# Altium PCB FIT_PM_Dual_Range_AFE.PcbDoc (part 9 of 17)
Units mm, origin at the board's own origin, x right, y up, seen from the top; angles counter-clockwise.
Board outline 259 x 114 mm, 8 copper layers (Top Layer, Mid-Layer 1, Mid-Layer 2, Layer 1, Layer 2, Mid-Layer 3, Mid-Layer 4, Bottom Layer), stack 1.616 mm thick; 963 components, 806 nets, 4757 pads, 2208 vias.
Unrouted connection lines stored in the file: 682.
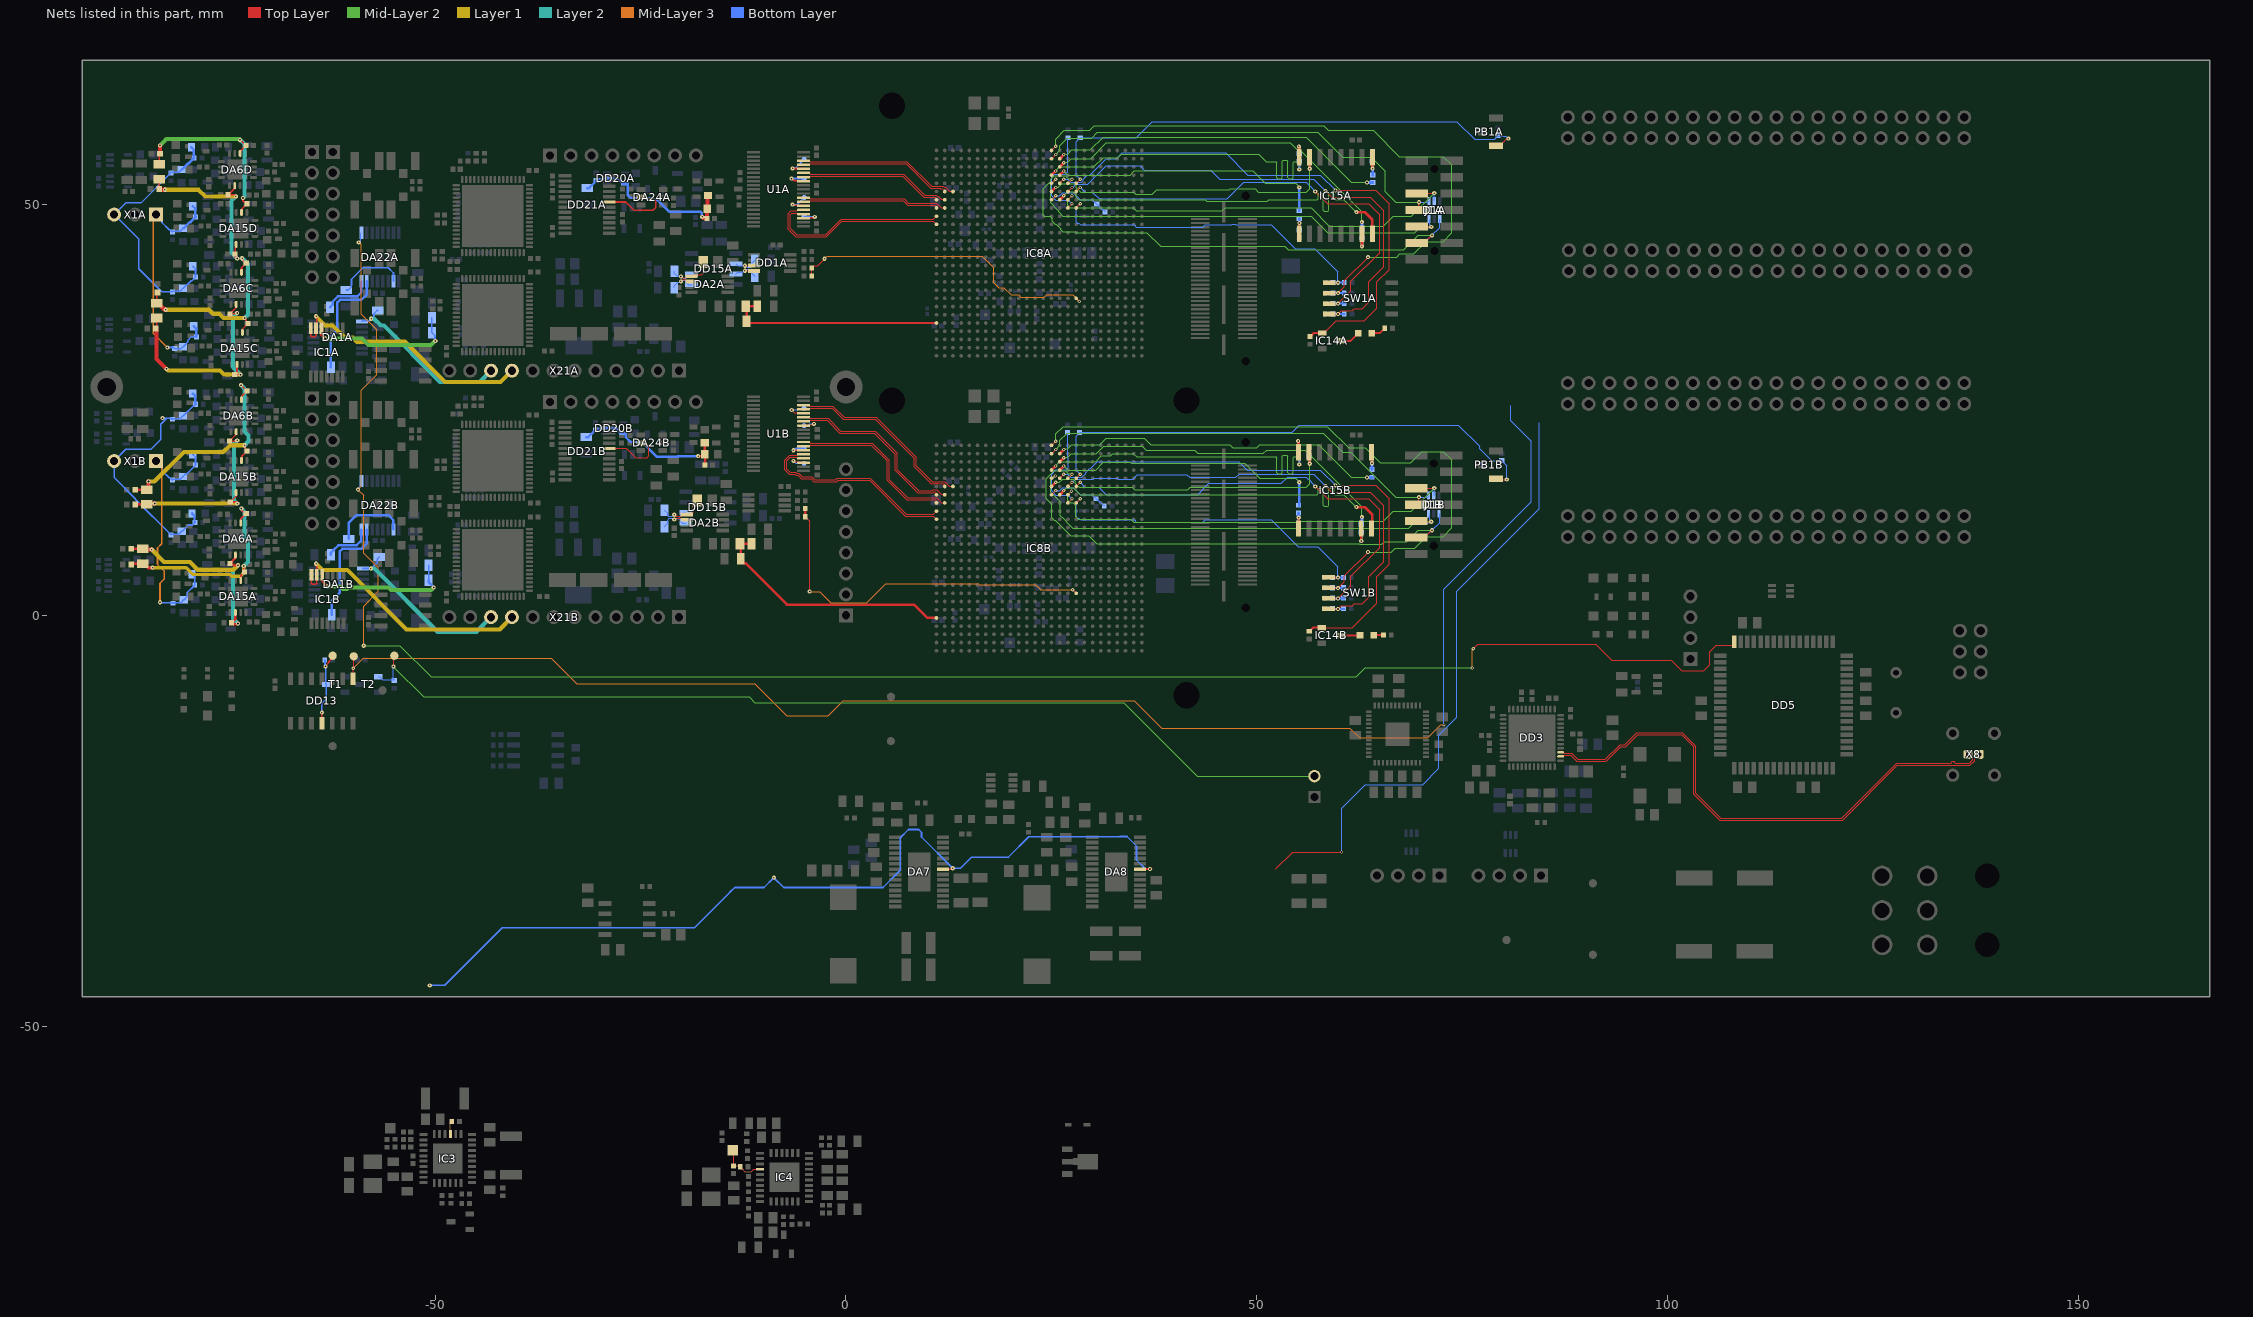
[diagram p11: the nets of this part, all layers, seen from the top]

## Via types
v1: diameter 0.5, hole 0.2, Top Layer to Bottom Layer, tented both sides, 1234 vias
v2: diameter 0.4, hole 0.2, Top Layer to Bottom Layer, tented both sides, 876 vias
v3: diameter 1, hole 0.6, Top Layer to Bottom Layer, tented both sides, 74 vias
v4: diameter 0.8, hole 0.4, Top Layer to Bottom Layer, tented both sides, 15 vias
v5: diameter 0.5, hole 0.2, Top Layer to Bottom Layer, 9 vias

## Nets (pads, with @x,y where several pads share a name; then routed paths per layer and width w, separated by ;. In a path a pad name is that pad's centre, name@x,y a point inside that pad or via, vN(x,y) a via of type N, cw(c..) or ccw(c..) an arc to the next point about the centre after c; other vN are vias at no path point) (continued)
DA15A_P: C64A.2 C74A.2 C304A.2 DA6A.2 DA15A.2 R300A.1 | length 27.3
  Top Layer w0.2: DA15A.2@-73.675,4.25 -73.675,4.825 C64A.2@-73.2,5.3 -73.3,5.4 v1(-73.3,6) ; DA6A.2@-73.675,11.25 -73.652,11.273 -73.652,11.748 C74A.2@-73,12.4 -73.21,12.61 -73.378,12.61 -73.543,12.775 -73.543,12.943 v1(-73.6,13)
  Top Layer w0.3: R300A.1@-87,6.2 -86.9,6.3 C304A.2@-85.6,6.3
  Top Layer w0.4: C304A.2@-85.6,6.3 -85.425,6.3 -84.925,5.8 v1(-84.4,5.8)
  Layer 1 w0.4: v1(-84.4,5.8) -80.33,5.8 -79.505,4.975 -74.984,4.975 -74.785,4.776 -73.698,4.776 -73.3,5.174 v1(-73.3,6)
  Layer 2 w0.5: v1(-73.6,13) -73.2,12.6 -73.2,9.6 -72.8,9.2 -72.8,6.5 v1(-73.3,6)
DA15B_P: C64B.2 C74B.2 C304B.2 DA6B.2 DA15B.2 R300B.1 | length 28.5
  Top Layer w0.2: v1(-73.641,28.022) -73.622,28.022 C74B.2@-72.9,27.3 -73.546,26.654 -73.546,26.279 DA6B.2@-73.575,26.25 ; DA15B.2@-73.575,18.85 -73.552,18.873 -73.552,19.348 C64B.2@-72.9,20 -73.11,20.21 -73.11,20.529 -73.2,20.619 v1(-73.2,20.7)
  Top Layer w0.3: R300B.1@-86.5,15.3 C304B.2@-85.1,15.3
  Top Layer w0.5: C304B.2@-85.1,15.3 -84.9,15.5 v1(-84.9,16.3)
  Layer 1 w0.5: v1(-84.9,16.3) -84.2,16.3 -80.6,19.9 -75.8,19.9 -75,20.7 v1(-73.2,20.7)
  Layer 2 w0.5: v1(-73.641,28.022) -73.2,27.581 -73.2,22.4 -72.706,21.906 -72.706,21.194 v1(-73.2,20.7)
DA15C_P: C64C.2 C74C.2 C304C.2 DA6C.2 DA15C.2 R300C.1 | length 24.9
  Top Layer w0.2: C304C.2@-83.9,38 -83.9,39.2 R300C.1@-83.8,39.3 ; DA6C.2@-73.575,41.75 -73.575,42.325 C64C.2@-73,42.9 -73.21,43.11 -73.31,43.11 -73.443,43.243 -73.443,43.409 v1(-73.501,43.466) ; DA15C.2@-73.475,34.45 -73.446,34.479 -73.446,34.854 C74C.2@-72.8,35.5 -73.01,35.71 -73.01,35.933 -73.2,36.123 v1(-73.2,36.2)
  Top Layer w0.5: C304C.2@-83.9,38 -83.725,38 -82.925,37.2 v1(-82.8,37.2)
  Layer 1 w0.5: v1(-82.8,37.2) -77.512,37.2 -77.016,36.704 -76.251,36.704 -75.748,36.2 v1(-73.2,36.2)
  Layer 2 w0.5: v1(-73.501,43.466) -72.81,42.775 -72.81,36.59 v1(-73.2,36.2)
DA15D_P: C64D.2 C74D.2 C304D.2 DA6D.2 DA15D.2 R300D.1 | length 24.5
  Top Layer w0.2: C304D.2@-83.6,54.9 -83.6,56.1 R300D.1@-83.5,56.2 ; v1(-73.756,57.881) -73.717,57.881 -73.6,57.763 -73.6,57.75 C74D.2@-73.05,57.2 -73.743,56.507 DA6D.2@-73.743,56.218 ; DA15D.2@-73.575,49.05 -73.546,49.079 -73.546,49.454 C64D.2@-72.9,50.1 -73.11,50.31 -73.278,50.31 -73.395,50.427 -73.395,50.795 v1(-73.4,50.8)
  Top Layer w0.5: R300D.1@-83.5,56.2 v1(-83.5,57.2)
  Mid-Layer 2 w0.5: v1(-83.5,57.2) -82.732,57.968 -73.844,57.968 v1(-73.756,57.881)
  Layer 2 w0.5: v1(-73.756,57.881) -73.744,57.893 -73.2,57.349 -73.2,51 v1(-73.4,50.8)
DA18A_P: C63A.2 C102A.2 C304A.1 DA6A.10 DA15A.10 R400A.1 | length 26.7
  Top Layer w0.3: R400A.1@-87,8.1 C304A.1@-85.6,8.1 ; DA15A.10@-74.325,0.35 -74.325,-0.425 C63A.2@-74.8,-0.9 -74.64,-1.06 -74.504,-1.06 -74.464,-1.1 -74.1,-1.1 v1(-74,-1) ; DA6A.10@-74.325,7.35 -74.335,7.34 -74.335,6.965 C102A.2@-75,6.3 -74.84,6.14 -74.54,6.14 -74.5,6.1 v1(-74,6.1)
  Top Layer w0.5: C304A.1@-85.6,8.1 -85.5,8 v1(-84.5,8)
  Layer 1 w0.5: v1(-84.5,8) -83,6.5 -79.865,6.5 -78.915,5.55 -74.55,5.55 v1(-74,6.1)
  Layer 2 w0.5: v1(-74,-1) -74.6,-0.4 -74.6,5.5 v1(-74,6.1)
DA18B_P: C63B.2 C102B.2 C304B.1 DA6B.10 DA15B.10 R400B.1 | length 25.4
  Top Layer w0.2: DA15B.10@-74.225,14.95 -74.254,14.921 -74.254,14.496 C102B.2@-74.95,13.8 -74.2,13.8 -74.2,13.781 -74.1,13.681 v1(-74.1,13.6) ; DA6B.10@-74.225,22.35 -74.225,22.059 -74.3,21.984 -74.3,21.95 C63B.2@-75.05,21.2 -74.4,21.2 -74.3,21.3 v1(-74.1,21.3)
  Top Layer w0.3: R400B.1@-86.5,13.5 C304B.1@-85.1,13.5
  Top Layer w0.5: C304B.1@-85.1,13.5 -84.993,13.607 v1(-84.15,13.607)
  Layer 1 w0.5: v1(-84.15,13.607) -84.141,13.597 -76.352,13.597 -76.349,13.6 v1(-74.1,13.6)
  Layer 2 w0.5: v1(-74.1,13.6) -74.5,14 -74.5,20.9 v1(-74.1,21.3)
DA18C_P: C63C.2 C102C.2 C304C.1 DA6C.10 DA15C.10 R400C.1 | length 28.6
  Top Layer w0.2: R400C.1@-84,34.9 -83.9,35 C304C.1@-83.9,36.2 ; DA6C.10@-74.225,37.85 -74.254,37.821 -74.254,37.446 C102C.2@-75,36.7 -74.294,36.7 -74.194,36.8 v1(-74.113,36.8) ; DA15C.10@-74.125,30.55 -74.125,29.575 C63C.2@-74.4,29.3 v1(-73.7,29.3)
  Top Layer w0.5: R400C.1@-84,34.9 -83.9,34.8 -83.9,31.2 v1(-82.7,30)
  Layer 1 w0.5: v1(-82.7,30) -82.5,29.8 -76.2,29.8 -75.7,29.3 v1(-73.7,29.3)
  Layer 2 w0.5: v1(-74.113,36.8) -74.6,36.313 -74.6,30.2 v1(-73.7,29.3)
DA18D_P: C63D.2 C102D.2 C304D.1 DA6D.10 DA15D.10 R400D.1 | length 23.4
  Top Layer w0.2: R400D.1@-83.6,51.9 C304D.1@-83.6,53.1 ; DA6D.10@-74.393,52.318 -74.393,52.027 -74.468,51.952 -74.468,51.932 C102D.2@-75.2,51.2 -74.417,51.2 -74.268,51.051 v1(-74.268,51) ; DA15D.10@-74.225,45.15 -74.225,44.859 -74.35,44.734 C63D.2@-74.35,44 -74.307,43.957 -74.307,43.557 -74.298,43.557 -74.181,43.44 v1(-74.1,43.44)
  Top Layer w0.5: R400D.1@-83.6,51.9 -83.5,51.8 v1(-82.9,51.8)
  Layer 1 w0.5: v1(-82.9,51.8) -78.8,51.8 -77.982,50.982 -74.286,50.982 v1(-74.268,51)
  Layer 2 w0.5: v1(-74.268,51) -74.8,50.468 -74.8,44.14 v1(-74.1,43.44)
DAC_SYNCA: DA22A.9 DA22B.9 DD5.16 | length 230.4
  Top Layer w0.15: v2(76.352,-4.073) 76.92,-3.504 91.273,-3.504 93.235,-5.466 100.428,-5.466 101.71,-6.748 104.403,-6.748 105.119,-6.032 105.119,-4.447 105.956,-3.61 107.919,-3.61 108.119,-3.41 DD5.16@108.119,-3.214
  Mid-Layer 2 w0.1: v1(-58.7,-3.7) -54.3,-3.7 -50.5,-7.5 62.133,-7.5 63.228,-6.406 76.211,-6.406 v2(76.219,-6.414)
  Mid-Layer 3 w0.1: v1(-59.3,45.4) -59,45.1 -59,36.669 -57.1,34.769 -57.1,29.3 -59,27.4 -59,15.7 v1(-59.4,15.3) -58.7,14.6 -58.7,7.546 -56.921,5.767 -56.921,2.906 -58.7,1.127 v1(-58.7,-3.7)
  Mid-Layer 3 w0.15: v2(76.219,-6.414) 76.229,-6.404 76.229,-4.277 76.352,-4.154 v2(76.352,-4.073)
  Bottom Layer w0.1: v1(-59.4,15.3) -59.4,15.4 -58.975,15.825 DA22B.9@-58.975,16.35 ; v1(-59.3,45.4) -59.053,45.647 -59.053,46.472 DA22A.9@-58.975,46.55
DAC_VOUTBA: DA22A.2 R45xA.1 | length 8.7
  Bottom Layer w0.2: R45xA.1@-60.8,39.6 -60.575,39.6 -60.2,39.975 -60.2,40.2 -60.195,40.205 -60.195,40.905 -58.8,42.3 -55.7,42.3 -55.075,41.675 DA22A.2@-55.075,40.65
DAC_VOUTBB: DA22B.2 R45xB.1 | length 9.2
  Bottom Layer w0.3: R45xB.1@-60.5,9.3 -60.5,11.3 -59.6,12.2 -55.7,12.2 -55.1,11.6 -55.1,10.475 DA22B.2@-55.075,10.45
DAC_VOUTCA: DA22A.7 R34A.1 | length 13.8
  Bottom Layer w0.3: R34A.1@-62.7,30.2 -62.7,34 -61.9,34.8 -61.9,38.1 -61.6,38.4 -59,38.4 -58.325,39.075 DA22A.7@-58.325,40.65
DAC_VOUTCB: DA22B.7 R34B.1 | length 13.5
  Bottom Layer w0.3: R34B.1@-62.6,0.1 -62.6,1.783 -61.6,2.783 -61.6,7.8 -61.306,8.094 -59.006,8.094 -58.325,8.775 DA22B.7@-58.325,10.45
DAC_VOUTDA: DA22A.8 R121xA.1 | length 6.1
  Bottom Layer w0.3: R121xA.1@-62.8,37.5 -62.475,37.825 -62.475,38.201 -61.841,38.835 -59.465,38.835 -58.975,39.325 DA22A.8@-58.975,40.65
DAC_VOUTDB: DA22B.8 R121xB.1 | length 5.9
  Bottom Layer w0.3: R121xB.1@-62.7,7.4 -62.7,7.625 -62.375,7.95 -62.364,7.95 -61.78,8.534 -59.566,8.534 -58.975,9.125 DA22B.8@-58.975,10.45
DD20_VCCA: C94A.2 C96A.2 DD20A.2 DD20A.5 R49A.2 R50A.2 R123A.2 | length 21
  Top Layer w0.5: v1(-17.5,48.5) -17.36,48.36 -16.96,48.36 C96A.2@-16.9,48.3 R50A.2@-16.9,49.5 -16.85,49.55 -16.85,51.05 R49A.2@-16.8,51.1
  Bottom Layer w0.3: R123A.2@-31.5,52 -31.275,52 -30.56,52.715 -30.56,52.79 C94A.2@-30.4,52.95 -30.24,53.11 -29.465,53.11 -29.375,53.2 DD20A.2@-29.1,53.2 -29.05,53.15 -27.775,53.15 -27.175,52.55 DD20A.5@-26.9,52.55 -26.625,52.55 -26.575,52.5 -26.575,51.175 -26.2,50.8 -23.698,50.8 -23.498,50.6 -23,50.6 -21.5,49.1 -17.676,49.1 -17.538,48.963 -17.538,48.538 v1(-17.5,48.5)
DD20_VCCB: C94B.2 C96B.2 DD20B.2 DD20B.5 R49B.2 R50B.2 R123B.2 | length 19.4
  Top Layer w0.3: v1(-17.993,19.38) -17.42,19.38 R50B.2@-17.2,19.6 ; R49B.2@-17.2,21 R50B.2@-17.2,19.6 ; C96B.2@-17.15,18.3 -17.15,19.55 R50B.2@-17.2,19.6
  Bottom Layer w0.3: R123B.2@-31.6,21.7 -31.375,21.7 -30.685,22.39 -30.66,22.39 C94B.2@-30.5,22.55 -30.34,22.71 -29.665,22.71 -29.575,22.8 DD20B.2@-29.3,22.8 -29.25,22.75 -27.975,22.75 -27.375,22.15 DD20B.5@-27.1,22.15 -26.85,22.15 -26.8,22.1 -26.8,21.676 -26.224,21.1 -24.8,21.1 -22.981,19.281 -20.564,19.281 -20.465,19.38 v1(-17.993,19.38)
DD21_DLYCTRLA: DA24A.5 DD21A.7 | length 8.9
  Top Layer w0.2: DD21A.7@-28.8,50.317 -26.818,50.317 -25.8,49.3 -23.5,49.3 -23.16,49.64 -23.16,50.36 -23.5,50.7 -24.75,50.7 DA24A.5@-24.95,50.9
DD21_DLYCTRLB: DA24B.5 DD21B.7 | length 7.7
  Top Layer w0.145: DD21B.7@-28.8,20.318 -26.718,20.318 -25.6,19.2 -24.2,19.2 -24,19.4 -24,20.5 -24.273,20.773 -24.773,20.773 DA24B.5@-25,21
DE1A: TP7A.1 U1A.34 | length 3.2
  Top Layer w0.2: v1(-6.5,54.4) -6.496,54.396 -5.2,54.396 U1A.34@-5.15,54.346
  Bottom Layer w0.2: v1(-6.5,54.4) -6.443,54.457 -6.135,54.457 TP7A.1@-5.086,55.506
DE1B: TP7B.1 U1B.34 | length 3.2
  Top Layer w0.15: v1(-6.6,25) -6.275,24.675 -5.225,24.675 U1B.34@-5.15,24.6
  Bottom Layer w0.15: v1(-6.6,25) -5.93,25 -5.73,25.2 TP7B.1@-5.1,25.2
DE2A: TP9A.1 U1A.31 | length 3.2
  Top Layer w0.2: v1(-6.627,53.152) -6.546,53.152 -6.29,52.896 -5.2,52.896 U1A.31@-5.15,52.846
  Bottom Layer w0.2: v1(-6.627,53.152) -6.61,53.169 -5.103,53.169 TP9A.1@-5.086,53.186
DE2B: TP9B.1 U1B.31 | length 2.6
  Top Layer w0.15: U1B.31@-5.15,23.1 -5.075,23.175 -4.12,23.175 -3.995,23.3 v1(-3.9,23.3)
  Bottom Layer w0.15: TP9B.1@-5.1,23.091 -4.624,23.091 -4.415,23.3 v1(-3.9,23.3)
DE3A: TP10A.1 U1A.25 | length 3.2
  Top Layer w0.2: v1(-6.5,49.991) -6.419,49.991 -6.324,49.896 -5.2,49.896 U1A.25@-5.15,49.846
  Bottom Layer w0.2: v1(-6.5,49.991) -5.961,49.991 TP10A.1@-5.086,50.866
DE3B: TP10B.1 U1B.25 | length 2.6
  Top Layer w0.2: v1(-6.4,20.1) U1B.25@-5.15,20.1
  Bottom Layer w0.2: v1(-6.4,20.1) -6.319,20.1 -6.119,20.3 TP10B.1@-5.1,20.3
DE4A: TP11A.1 U1A.22 | length 2.7
  Top Layer w0.2: U1A.22@-5.15,48.346 -5.1,48.396 -3.904,48.396 v1(-3.8,48.5)
  Bottom Layer w0.2: TP11A.1@-5.086,48.546 -5.063,48.523 -3.823,48.523 v1(-3.8,48.5)
DE4B: TP11B.1 U1B.22 | length 2.8
  Top Layer w0.15: v1(-6.4,18.8) -6.275,18.675 -5.225,18.675 U1B.22@-5.15,18.6
  Bottom Layer w0.15: v1(-6.4,18.8) -6.1,18.5 TP11B.1@-5.1,18.5
DONE1_LED_RA: LED1A.2 R144A.1 | length 1.8
  Top Layer w0.254: LED1A.2@64.004,34.346 64.991,34.346 65.41,34.765 65.41,34.785 R144A.1@65.573,34.948
DONE1_LED_RB: LED1B.2 R144B.1 | length 1.2
  Top Layer w0.254: LED1B.2@64.218,-2.402 R144B.1@65.423,-2.402
DONE1_LEDA: IC14A.3 LED1A.1 | length 2.5
  Top Layer w0.254: IC14A.3@60.268,33.412 61.421,33.412 LED1A.1@62.354,34.346
DONE1_LEDB: IC14B.3 LED1B.1 | length 2.4
  Top Layer w0.254: IC14B.3@60.193,-2.452 62.518,-2.452 LED1B.1@62.568,-2.402
DRV_OA_N: R237A.1 R237B.1 R238A.1 R238B.1 R239A.1 R239B.1 R240A.1 R240B.1 X1B.1 | length 33.4
  Mid-Layer 3 w0.2: X1B.1@-84,18.78 -83.3,18.08 -83.3,8.7 -83.8,8.2 -83.8,6.2 -83,5.4 -83,4.4 -83.5,3.9 v1(-83.5,1.6)
  Bottom Layer w0.2: X1B.1@-84,18.78 -83.25,18.03 -83.25,17.614 -82.386,16.75 -82.3,16.75 -82.02,16.47 R240B.1@-82,16.47 -81.92,16.55 -81.05,16.55 R239B.1@-80.7,16.9 -80.35,17.25 -80.2,17.25 -79.17,18.28 R238B.1@-79.17,18.3 -79.17,19.27 R237B.1@-79.5,19.6 ; v1(-83.5,1.6) -83.443,1.543 -81.973,1.543 R240A.1@-81.9,1.47 -81.82,1.55 -80.95,1.55 R239A.1@-80.6,1.9 -80.55,1.9 -80.2,2.25 -80.2,2.75 -79.27,3.68 -79.27,4.67 R237A.1@-79.6,5
DRV_OA_P: R233A.1 R233B.1 R234A.1 R234B.1 R235A.1 R235B.1 R236A.1 R236B.1 X1B.3 | length 32.9
  Bottom Layer w0.2: v1(-83.2,24) -82.665,24 ; R235A.1@-82.34,9.985 R235A.1@-82.15,9.795 ; R233A.1@-79.24,11.3 -79.24,11.28 -79.43,11.09 -79.45,11.09 -79.54,11 -80.025,11 -80.8,10.225 R236A.1@-80.85,10.225 -81.2,9.875 -82.07,9.875 R235A.1@-82.15,9.795 ; R233B.1@-79.17,25.7 -79.17,25.68 -79.36,25.49 -79.46,25.49 -80.65,24.3 R236B.1@-80.7,24.3 -81.05,23.95 -81.92,23.95 R235B.1@-82,23.87 -82.13,24 -82.665,24 ; -82.665,24 -83.4,23.265 -83.4,21.4 -84.6,20.2 -87.66,20.2 X1B.3@-89.08,18.78 -89.08,16.78 -86.5,14.2 -86.5,14.125 -82.17,9.795 R235A.1@-82.15,9.795
  Bottom Layer w0.3: R234A.1@-79.6,12.4 -79.3,12.1 -79.3,11.36 R233A.1@-79.24,11.3 ; R234B.1@-79.5,27 -79.2,26.7 -79.2,25.73 R233B.1@-79.17,25.7
DRV_OC_N: R237C.1 R237D.1 R238C.1 R238D.1 R239C.1 R239D.1 R240C.1 R240D.1 X1A.1 | length 30.7
  Mid-Layer 3 w0.2: X1A.1@-84,48.78 -84.3,48.48 -84.3,34.3 v1(-82.6,32.6)
  Bottom Layer w0.2: X1A.1@-84,48.78 -83.25,48.03 -83.25,47.814 -82.386,46.95 -82.3,46.95 -82.02,46.67 R240D.1@-82,46.67 -81.92,46.75 -81.05,46.75 R239D.1@-80.7,47.1 ; v1(-82.6,32.6) -81.83,32.6 R240C.1@-81.7,32.47 -80.93,32.47 R239C.1@-80.7,32.7 -80.65,32.7 -80.3,33.05 -80.3,33.1 -80.1,33.3 -80.1,33.5 -79.67,33.93 R238C.1@-79.1,33.93
  Bottom Layer w0.3: R239D.1@-80.7,47.1 -80.65,47.1 -79.88,47.87 -79.78,47.87 -79.17,48.48 R238D.1@-79.17,48.5 -79.2,48.53 -79.2,49.5 R237D.1@-79.5,49.8 ; R237C.1@-79.4,35.2 -79.1,34.9 R238C.1@-79.1,33.93
DRV_OC_P: R233C.1 R233D.1 R234C.1 R234D.1 R235C.1 R235D.1 R236C.1 R236D.1 X1A.3 | length 32.4
  Bottom Layer w0.2: R235D.1@-82.343,54.013 R235D.1@-82.168,53.838 ; R236D.1@-80.868,54.268 -81.218,53.918 -82.088,53.918 R235D.1@-82.168,53.838 ; R236C.1@-80.7,39.8 -81.05,39.45 -81.92,39.45 R235C.1@-82,39.37 -83.27,39.37 -86.1,42.2 -86.1,45.8 X1A.3@-89.08,48.78 -87.66,50.2 -85.82,50.2 -82.182,53.838 R235D.1@-82.168,53.838 ; R236C.1@-80.65,39.8 -79.707,40.743 -79.607,40.743 -79.17,41.18 R233C.1@-79.17,41.2 -79.17,42.17 R234C.1@-79.5,42.5
  Bottom Layer w0.3: R236D.1@-80.868,54.268 -80.818,54.268 -80.048,55.038 -79.948,55.038 -79.338,55.648 R233D.1@-79.338,55.668 -79.368,55.698 -79.368,56.668 R234D.1@-79.668,56.968
DRV_OFFSETA: DA1A.1 R41A.2 X21A.10 | length 21
  Layer 2 w0.5: v1(-57.8,36.1) -57.449,36.1 -56.623,35.274 -56.226,35.274 -52.813,31.861 -52.813,31.813 -49.4,28.4 -44.58,28.4 X21A.10@-43.2,29.78
  Bottom Layer w0.2: DA1A.1@-58.919,35.774 -58.829,35.865 -58.035,35.865 -57.458,36.442 -57.458,36.725 -57.083,37.1 R41A.2@-57,37.1
DRV_OFFSETB: DA1B.1 R41B.2 X21B.10 | length 21.4
  Layer 2 w0.5: v1(-57.83,5.691) -57.391,5.691 -49.7,-2 -44.98,-2 X21B.10@-43.2,-0.22
  Bottom Layer w0.2: DA1B.1@-58.813,5.706 -57.794,5.706 -57.058,6.442 -57.058,6.842 R41B.2@-56.8,7.1
DRV_VOCM_DIVA: IC1A.5 R39A.2 R42A.2 | length 18.3
  Top Layer w0.4: IC1A.5@-63.85,34.95 -63.825,34.925 -63.825,34.125 v1(-63.4,33.7)
  Mid-Layer 2 w0.5: v1(-63.4,33.7) -58.9,33.7 -58.1,32.9 -50.5,32.9 v1(-50,33.4)
  Bottom Layer w0.2: R42A.2@-50.4,36.2 R39A.2@-50.4,34.4 -50.025,34.025 -50.025,33.425 v1(-50,33.4)
DRV_VOCM_DIVB: IC1B.5 R39B.2 R42B.2 | length 18
  Top Layer w0.3: IC1B.5@-63.754,4.937 -63.679,4.862 -63.679,4.079 v1(-63.1,3.5)
  Mid-Layer 2 w0.5: v1(-63.1,3.5) -61.549,3.5 -61.249,3.2 -60.751,3.2 -60.55,3.401 -55.666,3.401 -55.365,3.1 -50.48,3.1 v1(-50.193,3.388)
  Bottom Layer w0.2: R39B.2@-50.8,4.3 R42B.2@-50.8,6.1
  Bottom Layer w0.3: R39B.2@-50.8,4.3 -50.8,4.075 -50.231,3.506 -50.231,3.426 v1(-50.193,3.388)
DRV_VOCMA: IC1A.6 IC1A.7 X21A.9 | length 31.9
  Top Layer w0.2: IC1A.7@-65.15,34.95 -65.15,34.017 -65.033,33.9 -64.617,33.9 -64.5,34.017 IC1A.6@-64.5,34.95 -64.4,35.05 -64.4,36.3 v1(-64.5,36.4)
  Layer 1 w0.5: v1(-64.5,36.4) -63.4,35.3 -62.5,35.3 -61,33.8 -60,33.8 -59.5,33.3 -53.7,33.3 -48.8,28.4 -42.04,28.4 X21A.9@-40.66,29.78
DRV_VOCMB: IC1B.6 IC1B.7 X21B.9 | length 32
  Top Layer w0.2: IC1B.7@-65.054,4.937 -65.1,4.892 -65.1,3.917 -64.983,3.8 -64.521,3.8 -64.404,3.917 IC1B.6@-64.404,4.937 -64.4,4.942 -64.4,6.1 -64.5,6.2 v1(-64.5,6.281)
  Layer 1 w0.5: v1(-64.5,6.281) -63.719,5.5 -60.7,5.5 -53.495,-1.705 -42.145,-1.705 X21B.9@-40.66,-0.22
EN_P0V85: B20.1 DD13.8 IC3.19 R45.2 | length 188.1
  Top Layer w0.15: DD13.8@-59.987,-7.724 v2(-59.987,-6.436) -59.915,-6.364 B20.1@-59.915,-4.989 ; IC3.19@-48.153,-63.152 -48.153,-61.786 R45.2@-47.981,-61.614
  Mid-Layer 3 w0.15: v2(-59.987,-6.436) -58.776,-5.225 -35.87,-5.225 -32.781,-8.314 -11.081,-8.314 -7.181,-12.214 -2.147,-12.214 -0.347,-10.414 35.119,-10.414 38.419,-13.714 61.319,-13.714 62.52,-14.915 70.813,-14.915 72.389,-13.338 v2(72.785,-13.338)
  Bottom Layer w0.15: v2(72.785,-13.338) 72.785,3.163 83.419,13.797 83.419,21.211 80.942,23.688 80.942,25.511
EN_P5V5_P3V8_P1V8_N5V5: DA7.8 DA8.8 IC4.26 R89.1 R91.2 TP8.1 | length 189
  Top Layer w0.15: TP8.1@-13.781,-65.114 -13.681,-65.214 R89.1@-13.681,-67.014 -12.981,-67.014 R91.2@-12.881,-67.114 ; R91.2@-12.881,-67.134 -12.666,-67.349 -12.646,-67.349 -12.295,-67.7 -11.5,-67.7 -11.227,-67.427 IC4.26@-10.444,-67.427 ; 52.306,-30.873 54.365,-28.814 v2(60.319,-28.814)
  Top Layer w0.2: DA7.8@11.654,-30.899 12.884,-30.899 v1(12.999,-30.784) ; DA8.8@35.644,-30.899 35.669,-30.873 v1@37.206,-30.873
  Bottom Layer w0.15: v2(60.319,-28.814) 60.319,-23.464 63.189,-20.594 70.189,-20.594 72.157,-18.626 72.157,-14.576 74.356,-12.377 74.356,2.923 84.41,12.976 84.41,23.425
  Bottom Layer w0.2: v1(-50.666,-45.035) -48.849,-45.035 -41.838,-38.024 -18.434,-38.024 -14.141,-33.731 ; -14.141,-33.722 -13.543,-33.124 -9.974,-33.124 v1(-8.781,-31.931) -7.588,-33.124 4.518,-33.124 6.603,-31.039 6.603,-27.088 7.616,-26.074 8.844,-26.074 9.193,-26.424 9.193,-26.978 v1(12.999,-30.784) 13.943,-30.784 15.303,-29.424 19.786,-29.424 22.244,-26.967 33.277,-26.967 33.319,-26.925 34.203,-26.925 35.365,-28.086 35.365,-29.786 36.427,-30.848 v1@36.981,-30.848
  other v1: 37.007,-30.873
EN_PSU: B17.1 JP1.2 R97.2 T2.1 | length 122.8
  Top Layer w0.15: v1(-55.093,-6.231) -55.037,-6.175 -55.037,-4.97 B17.1@-54.981,-4.914
  Mid-Layer 2 w0.15: v1(-55.093,-6.231) -51.4,-9.924 -11.797,-9.924 -11.107,-10.614 33.814,-10.614 42.774,-19.574 JP1.2@57.019,-19.574
  Bottom Layer w0.15: T2.1@-56.943,-7.464 -56.743,-7.464 -56.493,-7.714 -56.493,-7.737 -56.405,-7.824 R97.2@-54.997,-7.824 ; v1(-55.093,-6.231) -55.093,-7.729 R97.2@-54.997,-7.824 ; R97.2@-54.973,-7.824 R97.2@-54.997,-7.824
ENABLE: B18.1 DD13.4 R80.1 T1.3 | length 9.7
  Top Layer w0.2: DD13.4@-63.797,-13.124 v1(-63.798,-11.846) ; v1(-63.361,-6.209) -63.361,-6.164 -62.923,-5.727 -62.923,-5.573 -62.481,-5.131 B18.1@-62.481,-4.914
  Bottom Layer w0.2: v1(-63.798,-11.846) -63.798,-10.731 -63.281,-10.214 T1.3@-63.281,-8.414 -63.33,-8.365 -63.33,-6.24 v1(-63.361,-6.209) -63.406,-6.164 -63.406,-5.459 R80.1@-63.451,-5.414
Event1_N1: IC8A.AA25 U1A.35 | length 18.7
  Top Layer w0.145: U1A.35@-5.15,54.846 -4.5,54.846 -4.372,54.973 7.318,54.973 10.333,51.958 11.198,51.958 11.477,51.958 11.481,51.954 11.742,51.954 11.897,51.799 11.897,51.791 12.019,51.668 IC8A.AA25@12.019,51.586
Event1_N2: IC8B.AA25 U1B.35 | length 21.9
  Top Layer w0.1: 10.846,16.043 10.864,16.061 11.174,16.061
  Top Layer w0.145: U1B.35@-5.15,25.1 -4.5,25.1 -4.372,25.228 -1.701,25.228 -0.314,23.841 3.593,23.841 8.319,19.115 8.319,18.117 10.393,16.043 10.845,16.043 ; 11.193,16.043 11.871,16.043 11.961,15.954 11.961,15.744 IC8B.AA25@12.019,15.686
Event1_P1: IC8A.AA24 U1A.36 | length 19.7
  Top Layer w0.145: U1A.36@-5.15,55.346 -4.5,55.346 -4.372,55.218 7.419,55.218 10.434,52.203 11.3,52.203 11.471,52.203 11.481,52.213 11.829,52.213 11.942,52.101 12.117,52.101 12.588,51.629 12.976,51.629 IC8A.AA24@13.019,51.586
Event1_P2: IC8B.AA24 U1B.36 | length 22.9
  Top Layer w0.11: 10.872,16.288 11.177,16.288
  Top Layer w0.145: U1B.36@-5.15,25.6 -4.5,25.6 -4.372,25.473 -1.599,25.473 -0.213,24.086 3.695,24.086 8.564,19.216 8.564,18.219 10.495,16.288 10.872,16.288 ; 11.177,16.288 12.029,16.288 12.588,15.729 12.976,15.729 IC8B.AA24@13.019,15.686
Event2_N1: IC8A.Y26 U1A.32 | length 17.5
  Top Layer w0.145: U1A.32@-5.15,53.346 -4.5,53.346 -4.372,53.473 6.919,53.473 9.48,50.912 10.84,50.912 10.961,50.791 10.961,50.727 11.019,50.668 IC8A.Y26@11.019,50.586
Event2_N2: IC8B.Y26 U1B.32 | length 21.4
  Top Layer w0.145: U1B.32@-5.15,23.6 -4.5,23.6 -4.372,23.728 -2.274,23.728 -0.733,22.187 3.458,22.187 6.019,19.625 6.019,17.641 8.75,14.91 10.618,14.91 10.751,15.043 10.871,15.043 10.961,14.954 10.961,14.744 IC8B.Y26@11.019,14.686
Event2_P1: IC8A.Y25 U1A.33 | length 18.5
  Top Layer w0.145: U1A.33@-5.15,53.846 -4.5,53.846 -4.372,53.718 7.02,53.718 9.582,51.157 11.01,51.157 11.235,50.932 11.285,50.932 11.588,50.629 11.976,50.629 IC8A.Y25@12.019,50.586
Event2_P2: IC8B.Y25 U1B.33 | length 22.3
  Top Layer w0.145: U1B.33@-5.15,24.1 -4.5,24.1 -4.372,23.973 -2.173,23.973 -0.632,22.432 3.559,22.432 6.264,19.727 6.264,17.742 8.851,15.155 10.516,15.155 10.649,15.288 11.029,15.288 11.588,14.729 11.976,14.729 IC8B.Y25@12.019,14.686
Event3_N1: IC8A.W26 U1A.26 | length 16.7
  Top Layer w0.145: U1A.26@-5.15,50.346 -4.5,50.346 -4.372,50.473 6.967,50.473 7.504,49.936 10.864,49.936 10.961,49.84 10.961,49.644 IC8A.W26@11.019,49.586
Event3_N2: IC8B.W26 U1B.26 | length 20.6
  Top Layer w0.145: U1B.26@-5.15,20.6 -4.5,20.6 -4.372,20.727 3.08,20.727 5.019,18.789 5.019,16.43 7.406,14.043 10.871,14.043 10.961,13.954 10.961,13.744 IC8B.W26@11.019,13.686
Event3_P1: IC8A.W25 U1A.27 | length 17.7
  Top Layer w0.145: U1A.27@-5.15,50.846 -4.5,50.846 -4.372,50.718 7.068,50.718 7.605,50.181 10.966,50.181 11.157,49.99 11.227,49.99 11.588,49.629 11.976,49.629 IC8A.W25@12.019,49.586
Event3_P2: IC8B.W25 U1B.27 | length 21.6
  Top Layer w0.145: U1B.27@-5.15,21.1 -4.5,21.1 -4.372,20.973 3.182,20.973 5.264,18.89 5.264,16.531 7.507,14.288 11.029,14.288 11.588,13.729 11.976,13.729 IC8B.W25@12.019,13.686
Event4_N1: IC8A.V26 U1A.23 | length 22.6
  Top Layer w0.145: U1A.23@-5.15,48.846 -5.8,48.846 -5.927,48.973 -6.187,48.973 -6.627,48.973 -6.8,48.8 -6.8,47.1 -6.017,46.317 -2.482,46.317 -0.592,48.208 10.642,48.208 IC8A.V26@11.019,48.586
Event4_N2: IC8B.V26 U1B.23 | length 24.1
  Top Layer w0.145: U1B.23@-5.15,19.1 -5.8,19.1 -5.927,19.228 -6.773,19.228 -7.2,18.8 -7.2,17.8 -6.8,17.4 -6.115,17.4 -5.992,17.277 -5.731,17.277 -5.327,16.873 -4.155,16.873 -3.791,16.509 -1.229,16.509 -1.066,16.672 2.975,16.672 7.338,12.308 10.642,12.308 IC8B.V26@11.019,12.686
Event4_P1: IC8A.U26 U1A.24 | length 23.4
  Top Layer w0.145: U1A.24@-5.15,49.346 -5.8,49.346 -5.927,49.218 -6.289,49.218 -6.728,49.218 -7.045,48.901 -7.045,46.999 -6.119,46.072 -2.381,46.072 -0.49,47.963 10.642,47.963 IC8A.U26@11.019,47.586
Event4_P2: IC8B.U26 U1B.24 | length 24.9
  Top Layer w0.145: U1B.24@-5.15,19.6 -5.8,19.6 -5.927,19.473 -6.874,19.473 -7.445,18.901 -7.445,17.699 -6.901,17.155 -6.216,17.155 -6.094,17.032 -5.832,17.032 -5.428,16.628 -4.256,16.628 -3.892,16.264 -1.128,16.264 -0.965,16.427 2.873,16.427 7.237,12.063 10.642,12.063 IC8B.U26@11.019,11.686
EXT_LEMO_CLK_N: DD3.2 X8.2 | length 63.7
  Top Layer w0.145: DD3.2@86.999,-17.171 87.309,-17.171 87.436,-17.043 88.248,-17.043 88.964,-17.759 92.543,-17.759 94.336,-15.967 94.913,-15.967 96.366,-14.514 101.719,-14.514 103.219,-16.014 103.219,-21.764 106.369,-24.914 121.319,-24.914 127.974,-18.259 136.817,-18.259 137.377,-17.7 137.377,-17.477 137.889,-16.964 X8.2@137.889,-16.914
EXT_LEMO_CLK_P: DD3.3 X8.1 | length 63.6
  Top Layer w0.145: DD3.3@86.999,-16.671 87.309,-16.671 87.436,-16.798 88.35,-16.798 89.066,-17.514 92.442,-17.514 94.234,-15.722 94.812,-15.722 96.264,-14.269 101.821,-14.269 103.464,-15.913 103.464,-21.663 106.471,-24.669 121.218,-24.669 127.873,-18.014 134.406,-18.014 134.479,-18.014 134.578,-17.914 134.578,-17.869 134.678,-17.769 134.878,-17.769 134.977,-17.869 134.977,-17.914 135.077,-18.014 135.44,-18.014 136.716,-18.014 137.132,-17.598 137.132,-17.477 136.619,-16.964 X8.1@136.619,-16.914
FF_DA_N: C202A.2 DA2A.5 DD15A.2 R115A.1 | length 7.3
  Top Layer w0.145: v1(-20.1,41.25) -19.923,41.073 -19.527,41.073 -19.325,41.275 DA2A.5@-18.8,41.275 -18.647,41.427 -17.573,41.427 -17.36,41.64 -17.36,42.96 C202A.2@-17.4,43
  Bottom Layer w0.145: R115A.1@-20.887,41.888 -20.887,41.663 -20.484,41.26 -20.11,41.26 v1(-20.1,41.25) -20.015,41.25 -19.783,41.017 -19.508,41.017 -19.423,41.102 -19.423,41.303 -19.195,41.53 DD15A.2@-18.8,41.53
FF_DA_P: DA2A.6 DD15A.1 R116A.1 | length 4.4
  Top Layer w0.145: v1(-20.1,40.65) -19.923,40.828 -19.527,40.828 -19.325,40.625 DA2A.6@-18.8,40.625
  Bottom Layer w0.145: R116A.1@-20.9,39.9 -20.9,40.125 -20.498,40.527 -20.319,40.527 -20.196,40.65 v1(-20.1,40.65) -20.004,40.65 -19.881,40.772 -19.508,40.772 -19.423,40.688 -19.423,40.487 -19.195,40.26 DD15A.1@-18.8,40.26
FF_DB_N: C202B.2 DA2B.5 DD15B.2 R115B.1 | length 7.8
  Top Layer w0.145: v1(-20.9,12.25) -20.722,12.073 -20.127,12.073 -19.925,12.275 DA2B.5@-19.4,12.275 -18.875,12.275 -18.602,12.548 -18.602,13.498 C202B.2@-18.1,14
  Bottom Layer w0.145: R115B.1@-22.1,12.8 -21.698,12.398 -21.698,12.134 -21.613,12.049 -21.492,12.049 -21.469,12.073 -21.162,12.073 -20.985,12.25 v1(-20.9,12.25) -20.815,12.25 -20.598,12.033 -20.416,12.033 -20.37,11.987 -20.208,11.987 -20.123,12.072 -20.123,12.273 -19.895,12.5 DD15B.2@-19.5,12.5
FF_DB_P: DA2B.6 DD15B.1 R116B.1 | length 5.4
  Top Layer w0.145: v1(-20.9,11.65) -20.723,11.827 -20.127,11.827 -19.925,11.625 DA2B.6@-19.4,11.625
  Bottom Layer w0.145: R116B.1@-22.1,10.8 -21.698,11.202 -21.698,11.593 -21.486,11.804 -21.391,11.804 -21.368,11.827 -21.162,11.827 -20.985,11.65 v1(-20.9,11.65) -20.804,11.65 -20.666,11.788 -20.517,11.788 -20.472,11.742 -20.208,11.742 -20.123,11.658 -20.123,11.457 -19.895,11.23 DD15B.1@-19.5,11.23
FPGA_CCLKA: IC8A.Y11 IC15A.16 | length 47.5
  Top Layer w0.35: IC8A.Y11@26.019,50.586 v2(26.519,51.086) ; v1(62.119,49.086) 62.147,49.058 63.18,49.058 64.056,48.183 64.056,46.444 IC15A.16@64.064,46.436
  Mid-Layer 2 w0.15: v2(26.519,51.086) 27.009,51.575 27.625,51.575 28,51.2 28,50.9 28.314,50.586 43.74,50.586 43.935,50.391 51.293,50.391 51.487,50.586 57.287,50.586 57.362,50.586 57.461,50.685 57.461,51.282 57.56,51.381 58.02,51.381 58.119,51.282 58.119,49.284 58.218,49.185 58.678,49.185 58.777,49.284 58.777,51.282 58.876,51.381 59.336,51.381 59.435,51.282 59.435,50.685 59.534,50.586 59.613,50.586 60.619,50.586 v1(62.119,49.086)
FPGA_CCLKB: IC8B.Y11 IC15B.16 | length 47
  Top Layer w0.35: IC8B.Y11@26.019,14.686 v2(26.519,15.186) ; v1(62.119,13.186) 62.147,13.158 63.18,13.158 64.056,12.283 64.056,10.544 IC15B.16@64.064,10.536
  Mid-Layer 2 w0.15: v2(26.519,15.186) 26.894,15.561 27.639,15.561 28.514,14.686 57.287,14.686 57.362,14.686 57.461,14.785 57.461,15.382 57.56,15.481 58.02,15.481 58.119,15.382 58.119,13.384 58.218,13.285 58.678,13.285 58.777,13.384 58.777,15.382 58.876,15.481 59.336,15.481 59.435,15.382 59.435,14.785 59.534,14.686 59.613,14.686 60.619,14.686 v1(62.119,13.186)
FPGA_DONEA: IC8A.AB11 IC14A.1 R129A.1 | length 67.5
  Top Layer w0.127: IC14A.1@57.968,34.362 58.229,34.623 58.439,34.623 59.658,35.842 63.075,35.842 64.619,37.386 64.619,40.592 66.119,42.092 66.119,50.086 64.485,51.72 v1(59.593,51.72)
  Top Layer w0.145: IC8A.AB11@26.019,52.586 v2(26.519,53.086)
  Top Layer w0.254: R129A.1@56.468,33.932 56.488,33.932 56.918,34.362 IC14A.1@57.968,34.362
  Bottom Layer w0.127: v2(26.519,53.086) 27.005,53.086 27.369,52.722 28.67,52.722 28.883,52.935 28.883,53.083 29.386,53.586 29.69,53.586 31.704,55.6 32.9,55.6 33.6,56.3 46.2,56.3 48.914,53.586 57.727,53.586 v1(59.593,51.72)
FPGA_DONEB: IC8B.AB11 IC14B.1 R129B.1 | length 66.1
  Top Layer w0.127: IC14B.1@57.968,-1.538 61.595,-1.538 64.619,1.486 64.619,4.692 66.119,6.192 66.119,14.186 64.485,15.82 v1(59.593,15.82)
  Top Layer w0.145: IC8B.AB11@26.019,16.686 v2(26.519,17.186)
  Top Layer w0.254: R129B.1@56.393,-1.932 56.413,-1.932 56.843,-1.502 IC14B.1@57.893,-1.502
  Bottom Layer w0.127: v2(26.519,17.186) 27.005,17.186 27.369,16.822 28.722,16.822 29.156,17.256 29.156,17.336 29.642,17.822 29.722,17.822 30.6,18.7 47.836,18.7 48.85,17.686 57.727,17.686 v1(59.593,15.82)
FPGA_INIT_BA: IC8A.W10 R131A.1 | length 12.3
  Top Layer w0.145: IC8A.W10@27.019,49.586 v2(27.519,50.086)
  Bottom Layer w0.127: R131A.1@27.019,58.123 27.003,58.107 27.003,53.971 26.708,53.676 25.402,53.676 25.019,53.293 25.019,51.072 25.554,50.537 27.068,50.537 v2(27.519,50.086)
FPGA_INIT_BB: IC8B.W10 R131B.1 | length 12.2
  Top Layer w0.145: IC8B.W10@27.019,13.686 v2(27.519,14.186)
  Bottom Layer w0.127: R131B.1@27.019,22.186 27.019,19.172 27.06,19.131 27.06,17.968 26.798,17.706 25.525,17.706 25.019,17.2 25.019,15.172 25.554,14.637 27.068,14.637 v2(27.519,14.186)
FPGA_M0A: IC8A.AA10 R104A.1 R152A.2 SW1A.8 | length 60.7
  Top Layer w0.127: v1(58.37,51.632) 59.121,50.881 63.824,50.881 65.482,49.223 65.482,42.449 63.619,40.586 63.619,38.086 62.869,37.336 61.869,37.336 61.619,37.086 60.29,37.086 v1(59.882,36.678) 58.822,36.678 SW1A.8@58.819,36.681
  Top Layer w0.145: IC8A.AA10@27.019,51.586 v2(27.519,52.086)
  Bottom Layer w0.127: v2(27.519,52.086) 27.571,52.138 27.646,52.138 27.992,52.484 29.449,52.484 30.187,53.221 30.187,53.271 30.429,53.513 30.479,53.513 31.665,54.7 35.8,54.7 36.3,54.2 44.4,54.2 45.514,53.086 56.917,53.086 v1(58.37,51.632)
  Bottom Layer w0.254: R152A.2@59.286,36.684 R152A.2@59.289,36.681 59.878,36.681 v1(59.882,36.678) 59.883,36.679 60.647,36.679 R104A.1@60.649,36.681
FPGA_M0B: IC8B.AA10 R104B.1 R152B.2 SW1B.8 | length 59.7
  Top Layer w0.127: v1(58.37,15.732) 59.121,14.981 63.824,14.981 65.482,13.323 65.482,6.549 63.619,4.686 63.619,2.186 62.869,1.436 61.869,1.436 61.619,1.186 60.29,1.186 v1(59.882,0.778) 58.822,0.778 SW1B.8@58.819,0.781
  Top Layer w0.145: IC8B.AA10@27.019,15.686 v2(27.519,16.186)
  Bottom Layer w0.127: v2(27.519,16.186) 27.571,16.238 27.646,16.238 27.992,16.584 30.099,16.584 30.229,16.713 31.202,16.713 31.213,16.703 31.318,16.703 31.329,16.713 33.076,16.713 33.206,16.584 34.953,16.584 35.479,17.11 41.496,17.11 41.819,16.787 47.471,16.787 47.871,17.186 56.917,17.186 v1(58.37,15.732)
  Bottom Layer w0.254: R152B.2@59.211,0.821 R152B.2@59.214,0.817 ; R152B.2@59.289,0.781 59.878,0.781 v1(59.882,0.778) 59.883,0.779 60.647,0.779 R104B.1@60.649,0.781
FPGA_M1A: IC8A.AA9 R148A.1 R153A.2 SW1A.7 | length 55.5
  Top Layer w0.127: v1(57.119,51.586) 58.619,50.086 63.619,50.086 64.945,48.76 64.945,44.152 61.464,40.671 61.464,39.53 v1(59.882,37.948) 58.822,37.948 SW1A.7@58.819,37.951
  Top Layer w0.145: IC8A.AA9@28.019,51.586 v2(28.519,52.086)
  Bottom Layer w0.127: v2(28.519,52.086) 29.105,51.5 30,51.5 30.8,50.7 46.4,50.7 48.412,52.712 56.039,52.712 56.619,52.132 56.619,52.086 v1(57.119,51.586)
  Bottom Layer w0.254: R153A.2@59.286,37.954 R153A.2@59.289,37.951 59.878,37.951 v1(59.882,37.948) 59.883,37.949 60.647,37.949 R148A.1@60.649,37.951
FPGA_M1B: IC8B.AA9 R148B.1 R153B.2 SW1B.7 | length 55.6
  Top Layer w0.127: v1(57.119,15.686) 58.619,14.186 63.619,14.186 64.945,12.86 64.945,8.252 61.464,4.771 61.464,3.63 v1(59.882,2.048) 58.822,2.048 SW1B.7@58.819,2.051
  Top Layer w0.145: IC8B.AA9@28.019,15.686 v2(28.519,16.186)
  Bottom Layer w0.127: v2(28.519,16.186) 29.086,15.619 30.767,15.619 31.686,14.7 42.8,14.7 44.163,16.063 52.997,16.063 53.745,16.812 56.039,16.812 56.619,16.232 56.619,16.186 v1(57.119,15.686)
  Bottom Layer w0.254: R153B.2@59.211,2.091 R153B.2@59.214,2.087 ; R153B.2@59.289,2.051 59.878,2.051 v1(59.882,2.048) 59.883,2.049 60.647,2.049 R148B.1@60.649,2.051
FPGA_M2A: IC8A.AF12 R149A.1 R154A.2 SW1A.6 | length 80.5
  Top Layer w0.145: IC8A.AF12@25.019,56.586 v2(25.519,57.086) ; SW1A.6@58.819,39.221 58.822,39.218 v1(59.882,39.218) 60.648,39.984 60.648,40.708 v1(63.547,43.607)
  Mid-Layer 2 w0.145: v2(25.519,57.086) 25.519,57.974 26.598,59.053 29.653,59.053 30.2,59.6 58.133,59.6 58.68,59.053 64.152,59.053 67.369,55.836 72.289,55.836 72.731,55.835 73.744,54.822 73.744,46.556 72.674,45.486 70.622,45.486 69.122,43.986 67.419,43.986 67.04,43.607 v1(63.547,43.607)
  Bottom Layer w0.254: R154A.2@59.286,39.224 R154A.2@59.289,39.221 59.878,39.221 v1(59.882,39.218) 59.883,39.219 60.647,39.219 R149A.1@60.649,39.221
FPGA_M2B: IC8B.AF12 R149B.1 R154B.2 SW1B.6 | length 81
  Top Layer w0.145: IC8B.AF12@25.019,20.686 v2(25.519,21.186) ; SW1B.6@58.819,3.321 58.822,3.318 v1(59.882,3.318) 60.648,4.084 60.648,4.808 v1(63.547,7.707)
  Mid-Layer 2 w0.145: v2(25.519,21.186) 25.519,22.074 26.429,22.984 58.584,22.984 61.187,20.381 63.21,20.381 65.005,18.586 68.755,18.586 70.105,19.936 72.289,19.936 ; v1(63.547,7.707) 66.367,7.707 66.833,8.173 69.209,8.173 70.622,9.586 72.674,9.586 73.744,10.656 73.744,18.922 72.731,19.935 72.289,19.935
  Bottom Layer w0.254: R154B.2@59.211,3.361 R154B.2@59.214,3.357 ; R154B.2@59.289,3.321 59.878,3.321 v1(59.882,3.318) 59.883,3.319 60.647,3.319 R149B.1@60.649,3.321
FPGA_POR_overrideA: IC8A.Y12 R105A.2 R145A.1 | length 7.9
  Top Layer w0.145: IC8A.Y12@25.019,50.586 v2(25.519,51.086)
  Bottom Layer w0.127: v2(25.519,51.086) 26.005,51.086 26.369,51.449 27.67,51.449 28.019,51.1 28.019,51.072 28.505,50.586 29.969,50.586 30.499,50.056 30.539,50.056 30.766,49.829 30.766,49.789 31.208,49.347 31.304,49.347 31.53,49.12 R105A.2@31.53,49.1
FPGA_POR_overrideB: IC8B.Y12 R105B.2 R145B.1 | length 7.7
  Top Layer w0.145: IC8B.Y12@25.019,14.686 v2(25.519,15.186)
  Bottom Layer w0.127: v2(25.519,15.186) 26.005,15.186 26.369,15.549 27.67,15.549 28.019,15.2 28.019,15.172 28.505,14.686 29.969,14.686 R145B.1@30.453,14.202
  Bottom Layer w0.145: R145B.1@30.444,14.192 30.662,13.975 30.755,13.975 31.193,13.537 31.213,13.537 31.43,13.32 R105B.2@31.43,13.3
FPGA_PROGRAM_BA: C104A.2 IC8A.AB9 PB1A.2 R130A.1 | length 62.1
  Top Layer w0.145: IC8A.AB9@28.019,52.586 v2(28.519,53.086) ; PB1A.2@79.119,57.136 79.569,57.136 80.384,57.95 80.551,57.95 v1(80.619,58.018)
  Bottom Layer w0.145: v2(28.519,53.086) 28.019,53.586 28.019,57.623 28.282,57.886 28.282,57.906 28.499,58.123 R130A.1@28.519,58.123 35.306,58.123 37.269,60.086 74.369,60.086 76.519,57.936 78.95,57.936 79.316,58.302 80.336,58.302 v1(80.619,58.018)
FPGA_PROGRAM_BB: C104B.2 IC8B.AB9 PB1B.2 R130B.1 | length 63.5
  Top Layer w0.145: IC8B.AB9@28.019,16.686 v2(28.519,17.186)
  Top Layer w0.15: PB1B.2@79.415,16.616 79.507,16.524 v1(80.436,16.524)
  Bottom Layer w0.145: R130B.1@28.444,22.249 28.414,22.249 28.207,22.042 28.207,22.012 28.019,21.825 28.019,17.686 v2(28.519,17.186) ; R130B.1@28.444,22.259 54.293,22.259 55.187,23.153 74.552,23.153
  Bottom Layer w0.15: 74.552,23.153 77.119,20.586 77.119,20.304 78.599,18.823 C104B.2@79.827,18.823 80.436,18.213 v1(80.436,16.524)
FPGA_PUDCA: IC8A.W9 R150A.1 R155A.2 SW1A.5 | length 41.5
  Top Layer w0.127: SW1A.5@58.819,40.491 58.822,40.488 v1(59.882,40.488)
  Top Layer w0.145: IC8A.W9@28.019,49.586 v2(28.519,50.086)
  Bottom Layer w0.127: v2(28.519,50.086) 28.019,49.586 28.019,47.904 28.178,47.745 28.346,47.745 28.566,47.525 35.061,47.525 35.349,47.236 43.418,47.236 43.707,47.525 46.941,47.525 47.029,47.614 47.371,47.614 47.459,47.525 51.775,47.525 54.702,44.598 57.083,44.598 59.882,41.8 v1(59.882,40.488)
  Bottom Layer w0.254: R155A.2@59.286,40.494 R155A.2@59.289,40.491 59.878,40.491 v1(59.882,40.488) 59.883,40.489 60.647,40.489 R150A.1@60.649,40.491
FPGA_PUDCB: IC8B.W9 R150B.1 R155B.2 SW1B.5 | length 42.5
  Top Layer w0.127: SW1B.5@58.744,4.627 58.747,4.624 v1@59.807,4.624 ; SW1B.5@58.819,4.591 58.822,4.588 v1(59.882,4.588)
  Top Layer w0.145: IC8B.W9@28.019,13.686 v2(28.519,14.186)
  Bottom Layer w0.127: v2(28.519,14.186) 28.019,13.686 28.019,12.004 28.178,11.845 28.346,11.845 28.566,11.625 35.061,11.625 35.349,11.337 43.418,11.337 43.707,11.625 51.775,11.625 55.064,8.337 57.444,8.337 59.882,5.9 59.882,4.626 v1(59.882,4.588)
  Bottom Layer w0.254: R155B.2@59.214,4.627 59.803,4.627 59.807,4.624 59.808,4.626 59.882,4.626 60.572,4.626 R150B.1@60.574,4.627
FPGA_QSPI0_CS_BA: IC8A.AA12 IC15A.7 R164A.1 | length 37.9
  Top Layer w0.35: IC8A.AA12@25.019,51.586 v2(25.519,52.086) ; IC15A.7@56.444,55.736 56.447,55.733 56.447,54.358 v1(56.449,54.355)
  Mid-Layer 2 w0.15: v2(25.519,52.086) 25.558,52.125 25.852,52.125 26.238,52.511 27.889,52.511 28,52.4 28,52.075 28.56,51.515 35.001,51.515 35.289,51.227 37.262,51.227 37.835,51.8 46.7,51.8 46.8,51.9 49.8,51.9 50.185,51.515 56.031,51.515 56.449,51.932 v1(56.449,54.355)
  Bottom Layer w0.35: R164A.1@56.444,55.266 56.447,55.263 56.447,54.358 v1(56.449,54.355)
FPGA_QSPI0_CS_BB: IC8B.AA12 IC15B.7 R164B.1 | length 37.5
  Top Layer w0.35: IC8B.AA12@25.019,15.686 v2(25.519,16.186) ; IC15B.7@56.444,19.836 56.447,19.833 56.447,18.458 v1(56.449,18.455)
  Mid-Layer 2 w0.15: v2(25.519,16.186) 25.989,16.186 26.364,16.561 27.674,16.561 27.894,16.341 27.894,16.106 28.385,15.615 34.83,15.615 35.169,15.275 41.576,15.275 41.916,15.615 56.031,15.615 56.449,16.032 v1(56.449,18.455)
  Bottom Layer w0.35: R164B.1@56.444,19.366 56.447,19.363 56.447,18.458 v1(56.449,18.455)
FPGA_QSPI0_IO0A: IC8A.AD11 R165A.1 | length 43.7
  Top Layer w0.35: IC8A.AD11@26.019,54.586 v2(26.519,55.086)
  Mid-Layer 2 w0.15: v2(26.519,55.086) 26.586,55.153 26.985,55.153 27.418,55.586 29.786,55.586 31.7,57.5 54.104,57.5 54.943,56.661 55.253,56.661 62.799,49.115 v1@62.799,47.861
  Bottom Layer w0.35: R165A.1@62.793,46.907 v1(62.792,47.855)
FPGA_QSPI0_IO0B: IC8B.AD11 R165B.1 | length 43.1
  Top Layer w0.35: IC8B.AD11@26.019,18.686 v2(26.519,19.186)
  Mid-Layer 2 w0.15: v2(26.519,19.186) 26.586,19.253 26.985,19.253 27.418,19.686 30.489,19.686 31.364,20.561 36.063,20.561 36.549,20.075 42.435,20.075 42.793,19.717 50.817,19.717 51.2,20.1 55.914,20.1 62.799,13.215 v1@62.799,11.961
  Bottom Layer w0.35: R165B.1@62.793,11.007 v1(62.792,11.955)
FPGA_QSPI0_IO1A: IC8A.AC12 R166A.1 | length 41.4
  Top Layer w0.35: IC8A.AC12@25.019,53.586 v2(25.519,54.086)
  Mid-Layer 2 w0.15: v2(25.519,54.086) 25.519,54.134 25.971,54.586 30.186,54.586 31.3,55.7 33.1,55.7 33.5,56.1 50.235,56.1 51.143,55.192 51.615,55.192 51.982,55.192 52.348,55.192 52.447,55.093 52.447,53.236 52.546,53.138 53.006,53.138 53.105,53.236 53.105,55.268 53.204,55.367 53.664,55.367 53.763,55.268 53.763,53.236 53.862,53.138 54.322,53.138 54.421,53.236 54.421,55.093 54.52,55.192 54.893,55.192 55.116,54.968 55.17,54.915 v1(55.17,54.28)
  Bottom Layer w0.35: v1(55.17,54.28) 55.172,54.282 55.172,55.264 R166A.1@55.174,55.266
FPGA_QSPI0_IO1B: IC8B.AC12 R166B.1 | length 41
  Top Layer w0.35: IC8B.AC12@25.019,17.686 v2(25.519,18.186)
  Mid-Layer 2 w0.15: v2(25.519,18.186) 25.519,18.234 25.971,18.686 30.386,18.686 31.1,19.4 32.203,19.4 32.489,19.686 34.984,19.686 35.378,19.292 51.615,19.292 52.348,19.292 52.447,19.193 52.447,17.336 52.546,17.238 53.006,17.238 53.105,17.336 53.105,19.368 53.204,19.467 53.664,19.467 53.763,19.368 53.763,17.336 53.862,17.238 54.322,17.238 54.421,17.336 54.421,19.193 54.52,19.292 54.893,19.292 55.116,19.068 55.17,19.015 v1(55.17,18.38)
  Bottom Layer w0.35: v1(55.17,18.38) 55.172,18.382 55.172,19.364 R166B.1@55.174,19.366
FPGA_QSPI0_IO2A: IC8A.AC11 R167A.1 | length 33.5
  Top Layer w0.35: IC8A.AC11@26.019,53.586 v2(26.519,54.086)
  Mid-Layer 2 w0.15: v2(26.519,54.086) 27.019,53.586 34.586,53.586 35.1,54.1 49.499,54.1 51.013,52.586 54.733,52.586 55.167,52.151 v1(55.167,52.094)
  Bottom Layer w0.35: v1(55.167,52.094) 55.167,49.258 R167A.1@55.174,49.251
FPGA_QSPI0_IO2B: IC8B.AC11 R167B.1 | length 33.8
  Top Layer w0.35: IC8B.AC11@26.019,17.686 v2(26.519,18.186)
  Mid-Layer 2 w0.15: v2(26.519,18.186) 27.019,17.686 30.386,17.686 31.329,18.629 34.607,18.629 34.718,18.518 48.556,18.518 50.388,16.686 54.733,16.686 55.167,16.251 v1(55.167,16.194)
  Bottom Layer w0.35: v1(55.167,16.194) 55.167,13.358 R167B.1@55.174,13.351
FPGA_QSPI0_IO3A: IC8A.AE11 R168A.1 | length 41.5
  Top Layer w0.35: IC8A.AE11@26.019,55.586 v2(26.519,56.086)
  Mid-Layer 2 w0.15: v2(26.519,56.086) 26.586,56.153 26.985,56.153 27.493,56.661 29.761,56.661 31.3,58.2 56.03,58.2 56.828,57.401 56.828,57.377 61.518,52.686 v1(63.425,52.686)
  Bottom Layer w0.35: v1(63.425,52.686) 63.431,52.68 64.112,52.68 R168A.1@64.119,52.673
FPGA_QSPI0_IO3B: IC8B.AE11 R168B.1 | length 41.2
  Top Layer w0.35: IC8B.AE11@26.019,19.686 v2(26.519,20.186)
  Mid-Layer 2 w0.15: v2(26.519,20.186) 26.586,20.253 26.985,20.253 27.493,20.761 30.861,20.761 31.661,21.561 36.292,21.561 37.092,20.761 46.739,20.761 47.109,20.391 49.991,20.391 50.361,20.761 54.942,20.761 ; 54.943,20.761 55.295,20.761 ; 55.296,20.761 57.543,20.761 61.518,16.786 v1(63.425,16.786)
  Bottom Layer w0.35: v1(63.425,16.786) 63.431,16.78 64.112,16.78 R168B.1@64.119,16.773
FPGA_QSPI0IO0A: IC15A.15 R165A.2 | length 2.6
  Top Layer w0.35: v1(62.794,44.919) IC15A.15@62.794,46.436
  Bottom Layer w0.35: v1(62.794,44.919) R165A.2@62.794,45.966
FPGA_QSPI0IO0B: IC15B.15 R165B.2 | length 2.6
  Top Layer w0.35: v1(62.719,9.055) IC15B.15@62.719,10.572
  Bottom Layer w0.35: v1(62.719,9.055) R165B.2@62.719,10.102
FPGA_QSPI0IO1A: IC15A.8 R166A.2 | length 2.3
  Top Layer w0.35: v1(55.119,57.086) 55.147,57.058 55.147,55.763 IC15A.8@55.174,55.736
  Bottom Layer w0.35: v1(55.119,57.086) 55.119,57.045 55.174,56.99 R166A.2@55.174,56.206
FPGA_QSPI0IO1B: IC15B.8 R166B.2 | length 2.3
  Top Layer w0.35: v1(55.044,21.222) 55.072,21.195 55.072,19.9 IC15B.8@55.099,19.872
  Bottom Layer w0.35: v1(55.044,21.222) 55.044,21.182 55.099,21.127 R166B.2@55.099,20.342
FPGA_QSPI0IO2A: IC15A.9 R108A.1 R167A.2 | length 2.7
  Top Layer w0.35: IC15A.9@55.174,46.436 55.18,46.441 55.18,47.744 v1(55.185,47.75)
  Bottom Layer w0.35: R108A.1@55.174,46.906 R167A.2@55.174,48.311
FPGA_QSPI0IO2B: IC15B.9 R108B.1 R167B.2 | length 2.7
  Top Layer w0.35: IC15B.9@55.099,10.572 55.105,10.578 55.105,11.881 v1(55.11,11.887)
  Bottom Layer w0.35: R108B.1@55.099,11.042 R167B.2@55.099,12.448
FPGA_QSPI0IO3A: IC15A.1 R107A.1 R168A.2 | length 3.1
  Top Layer w0.35: IC15A.1@64.064,55.736 64.087,55.713 64.087,54.396 v1(64.11,54.373)
  Bottom Layer w0.35: R107A.1@64.064,55.266 64.087,55.243 64.087,54.396 v1(64.11,54.373) 64.115,54.369 64.115,53.617 R168A.2@64.119,53.613
FPGA_QSPI0IO3B: IC15B.1 R107B.1 R168B.2 | length 3.1
  Top Layer w0.35: IC15B.1@63.989,19.872 64.012,19.849 64.012,18.533 v1(64.035,18.51)
  Bottom Layer w0.35: R107B.1@63.989,19.402 64.012,19.379 64.012,18.533 v1(64.035,18.51) 64.04,18.505 64.04,17.754 R168B.2@64.044,17.749
FPGA_TCKA: D1A.3 IC8A.AB12 J1A.6 R158A.1 | length 56.6
  Top Layer w0.145: IC8A.AB12@25.019,52.586 v2(25.519,53.086)
  Top Layer w0.15: J1A.6@69.494,47.336 69.543,47.287 v1(71.244,47.287)
  Mid-Layer 2 w0.145: v2(25.519,53.086) 24.936,52.503 24.936,50.196 25.673,49.458 25.892,49.24 25.892,49.108 26.414,48.586 56.619,48.586 58.619,46.586 69.244,46.586 69.945,47.287 v1(71.244,47.287)
  Bottom Layer w0.15: R158A.1@69.589,47.336 69.765,47.16 71.022,47.16 71.149,47.287 v1(71.244,47.287) 71.244,47.376 71.07,47.55 71.07,48.135 D1A.3@70.969,48.236
FPGA_TCKB: D1B.3 IC8B.AB12 J1B.6 R158B.1 | length 56.8
  Top Layer w0.145: IC8B.AB12@25.019,16.686 25.068,16.686 25.29,16.908 25.426,16.908 v2(25.475,16.957)
  Top Layer w0.15: J1B.6@69.494,11.436 69.543,11.387 v1(71.244,11.387)
  Mid-Layer 2 w0.145: v2(25.475,16.957) 24.936,16.418 24.936,14.97 26.1,13.806 26.1,12.4 26.1,12.132 26.432,11.8 27.2,11.032 27.632,10.6 27.8,10.6 68.478,10.6 69.265,11.387 v1(71.244,11.387)
  Bottom Layer w0.15: R158B.1@69.589,11.436 69.765,11.26 71.022,11.26 71.149,11.387 v1(71.244,11.387) 71.244,11.476 71.07,11.65 71.07,12.235 D1B.3@70.969,12.336
FPGA_TDIA: D1A.5 IC8A.Y10 J1A.10 R106A.1 | length 54.8
  Top Layer w0.145: IC8A.Y10@27.019,50.586 v2(27.519,51.086)
  Top Layer w0.15: J1A.10@69.494,51.336 69.544,51.386 v1(71.605,51.386)
  Mid-Layer 2 w0.145: v2(27.519,51.086) 27,50.567 27,49.9 27.314,49.586 34.987,49.586 35.346,49.227 45.803,49.227 46.162,49.586 56.619,49.586 58.825,47.38 65.414,47.38 66.619,48.586 68.805,48.586 v1(71.605,51.386)
  Bottom Layer w0.15: R106A.1@69.589,51.336 69.639,51.386 v1(71.605,51.386) 71.612,51.379 71.612,50.443 D1A.5@71.619,50.436
FPGA_TDIB: D1B.5 IC8B.Y10 J1B.10 R106B.1 | length 55.2
  Top Layer w0.145: IC8B.Y10@27.019,14.686 27.428,15.095 v2(27.444,15.095)
  Top Layer w0.15: J1B.10@69.494,15.436 69.544,15.486 v1(71.605,15.486)
  Mid-Layer 2 w0.145: v2(27.444,15.095) 27.428,15.095 27.022,14.689 27.022,14.465 27.022,13.997 27.333,13.686 27.66,13.686 27.98,13.365 27.98,12.943 27.98,11.975 28.28,11.676 34.693,11.676 34.81,11.558 35.041,11.328 35.346,11.328 35.654,11.328 36.346,11.328 36.654,11.328 55.149,11.328 55.302,11.48 65.414,11.48 66.619,12.686 68.805,12.686 v1(71.605,15.486)
  Bottom Layer w0.15: R106B.1@69.589,15.436 69.639,15.486 v1(71.605,15.486) 71.612,15.479 71.612,14.543 D1B.5@71.619,14.536
FPGA_TDOA: D1A.4 IC8A.AE12 J1A.8 R159A.1 | length 54.8
  Top Layer w0.145: IC8A.AE12@25.019,55.586 v2(25.519,56.086)
  Top Layer w0.15: J1A.8@69.494,49.336 69.743,49.585 v1(69.743,50.282)
  Mid-Layer 2 w0.15: v2(25.519,56.086) 26.019,56.586 26.019,57.187 26.918,58.086 29.886,58.086 30.6,58.8 57.405,58.8 60.459,55.746 63.959,55.746 65.619,54.086 65.619,51.586 66.923,50.282 v1(69.743,50.282)
  Bottom Layer w0.15: R159A.1@69.559,49.336 69.743,49.52 v1(69.743,50.282) 70.844,50.282 70.969,50.407 D1A.4@70.969,50.436
FPGA_TDOB: D1B.4 IC8B.AE12 J1B.8 R159B.1 | length 52.7
  Top Layer w0.145: IC8B.AE12@25.019,19.686 v2(25.519,20.186)
  Top Layer w0.15: J1B.8@69.494,13.436 69.743,13.685 v1(69.743,14.382)
  Mid-Layer 2 w0.15: v2(25.519,20.186) 26.019,20.686 26.019,21.287 26.918,22.186 58.119,22.186 60.459,19.846 61.459,19.846 66.923,14.382 v1(69.743,14.382)
  Bottom Layer w0.15: R159B.1@69.559,13.436 69.743,13.62 v1(69.743,14.382) 70.844,14.382 70.969,14.507 D1B.4@70.969,14.536
FPGA_TMSA: D1A.1 IC8A.AB10 J1A.4 R157A.1 | length 65.2
  Top Layer w0.145: IC8A.AB10@27.019,52.586 v2(27.519,53.086)
  Top Layer w0.15: J1A.4@69.494,45.336 70.369,45.336 71.286,46.253 v1(71.329,46.253)
  Mid-Layer 2 w0.15: v2(27.519,53.086) 27.452,53.153 27.053,53.153 26.695,53.511 25.343,53.511 24.944,53.112 24.944,52.861 24,51.917 24,48.7 24.148,48.552 24.848,48.552 25.106,48.294 25.106,47.969 25.144,47.931 25.364,47.711 25.49,47.584 25.616,47.584 26.144,47.056 26.144,46.931 26.364,46.711 26.674,46.711 27.364,46.711 27.674,46.711 27.889,46.711 28,46.6 36.6,46.6 38.3,44.9 53.4,44.9 53.806,44.494 67.889,44.494 69.648,46.253 v1(71.329,46.253)
  Bottom Layer w0.15: R157A.1@69.589,45.336 69.589,45.356 69.804,45.571 70.646,45.571 v1(71.329,46.253) 72.269,47.194 D1A.1@72.269,48.236
FPGA_TMSB: D1B.1 IC8B.AB10 J1B.4 R157B.1 | length 64.6
  Top Layer w0.145: IC8B.AB10@27.019,16.686 v2(27.519,17.186)
  Top Layer w0.15: J1B.4@69.494,9.436 70.369,9.436 71.286,10.353 v1(71.329,10.353)
  Mid-Layer 2 w0.15: v2(27.519,17.186) 27.452,17.253 27.053,17.253 26.695,17.611 25.343,17.611 24.359,16.627 24.359,14.181 25.019,13.521 25.019,11.881 25.339,11.561 25.364,11.561 25.475,11.561 26.364,10.672 27.005,10.031 27.233,9.802 27.342,9.694 29.542,9.694 29.674,9.561 29.894,9.341 30.535,8.7 62.474,8.7 62.543,8.63 62.895,8.63 65.235,8.63 65.586,8.982 68.277,8.982 69.648,10.353 v1(71.329,10.353)
  Bottom Layer w0.15: R157B.1@69.589,9.436 69.589,9.456 69.804,9.671 70.646,9.671 v1(71.329,10.353) 72.269,11.294 D1B.1@72.269,12.336
Gate_STR1_i1: C1A.1 IC8A.E26 R1A.1 R9A.1 | length 26.4
  Top Layer w0.3: R1A.1@-10.8,37.6 C1A.1@-12.2,37.6 -12.1,37.5 R9A.1@-12.1,35.8 -11.886,35.586 IC8A.E26@11.019,35.586
Gate_STR1_i2: C1B.1 IC8B.E26 R1B.1 R9B.1 | length 30.2
  Top Layer w0.3: R1B.1@-11.5,8.7 C1B.1@-12.9,8.7 -12.8,8.6 R9B.1@-12.8,6.9 -12.8,6.675 -12.475,6.35 -12.25,6.35 -7.2,1.3 8.3,1.3 9.914,-0.314 IC8B.E26@11.018,-0.314
Gate_STR1_o1: IC8A.H9 R76A.2 R77A.2 | length 38.2
  Top Layer w0.1: R77A.2@-4.16,41.3 R76A.2@-4.16,42.3 -4.16,42.32 -3.92,42.56 -3.44,42.56 v1(-2.6,43.4) ; IC8A.H9@28.019,38.586 28.4,38.205 v2(28.4,38.2)
  Mid-Layer 3 w0.1: v1(-2.6,43.4) -2.3,43.7 16.6,43.7 18,42.3 18,40.5 18.6,39.9 19.21,39.9 20.11,39 21,39 21.264,38.736 24.155,38.736 24.419,39 27.6,39 v2(28.4,38.2)
Gate_STR1_o2: IC8B.H9 R76B.2 R77B.2 | length 44.8
  Top Layer w0.1: R77B.2@-4.96,12 -4.96,11.98 -4.418,11.438 v1(-4.418,2.9) ; v2(27.6,3.1) 27.605,3.1 IC8B.H9@28.019,2.686
  Top Layer w0.3: R77B.2@-4.96,12 R76B.2@-4.96,13
  Mid-Layer 3 w0.1: v1(-4.418,2.9) -3.2,2.9 -1.84,1.54 2.54,1.54 4.844,3.844 16.109,3.844 16.252,3.7 23.1,3.7 23.7,3.1 v2(27.6,3.1)
Gate_STR1A_N: DD1A.3 DD15A.6 R117A.1 | length 4.1
  Top Layer w0.145: v1(-12.3,42.55) -11.225,42.55 DD1A.3@-11.2,42.575
  Bottom Layer w0.145: DD15A.6@-13.4,42.8 -13.173,42.573 -12.323,42.573 v1(-12.3,42.55) -12.215,42.55 -12.038,42.373 -11.587,42.373 -11.502,42.457 -11.502,42.798 R117A.1@-11.1,43.2
Gate_STR1A_P: DD1A.4 DD15A.7 R10A.1 | length 4.2
  Top Layer w0.145: v1(-12.3,41.95) -11.225,41.95 DD1A.4@-11.2,41.925
  Bottom Layer w0.145: DD15A.7@-13.4,41.53 -13.173,41.757 -12.589,41.757 -12.396,41.95 v1(-12.3,41.95) -12.215,41.95 -12.038,42.128 -11.587,42.128 -11.502,42.043 -11.502,41.702 R10A.1@-11.1,41.3